# Altium PCB Monster_Tile.PcbDoc
Units mil, origin at the board's own origin, x right, y up, seen from the top; angles counter-clockwise.
Board outline 1250 x 1250 mil, 2 copper layers (Top Layer, Bottom Layer); 7 components, 5 nets, 24 pads, 0 vias.
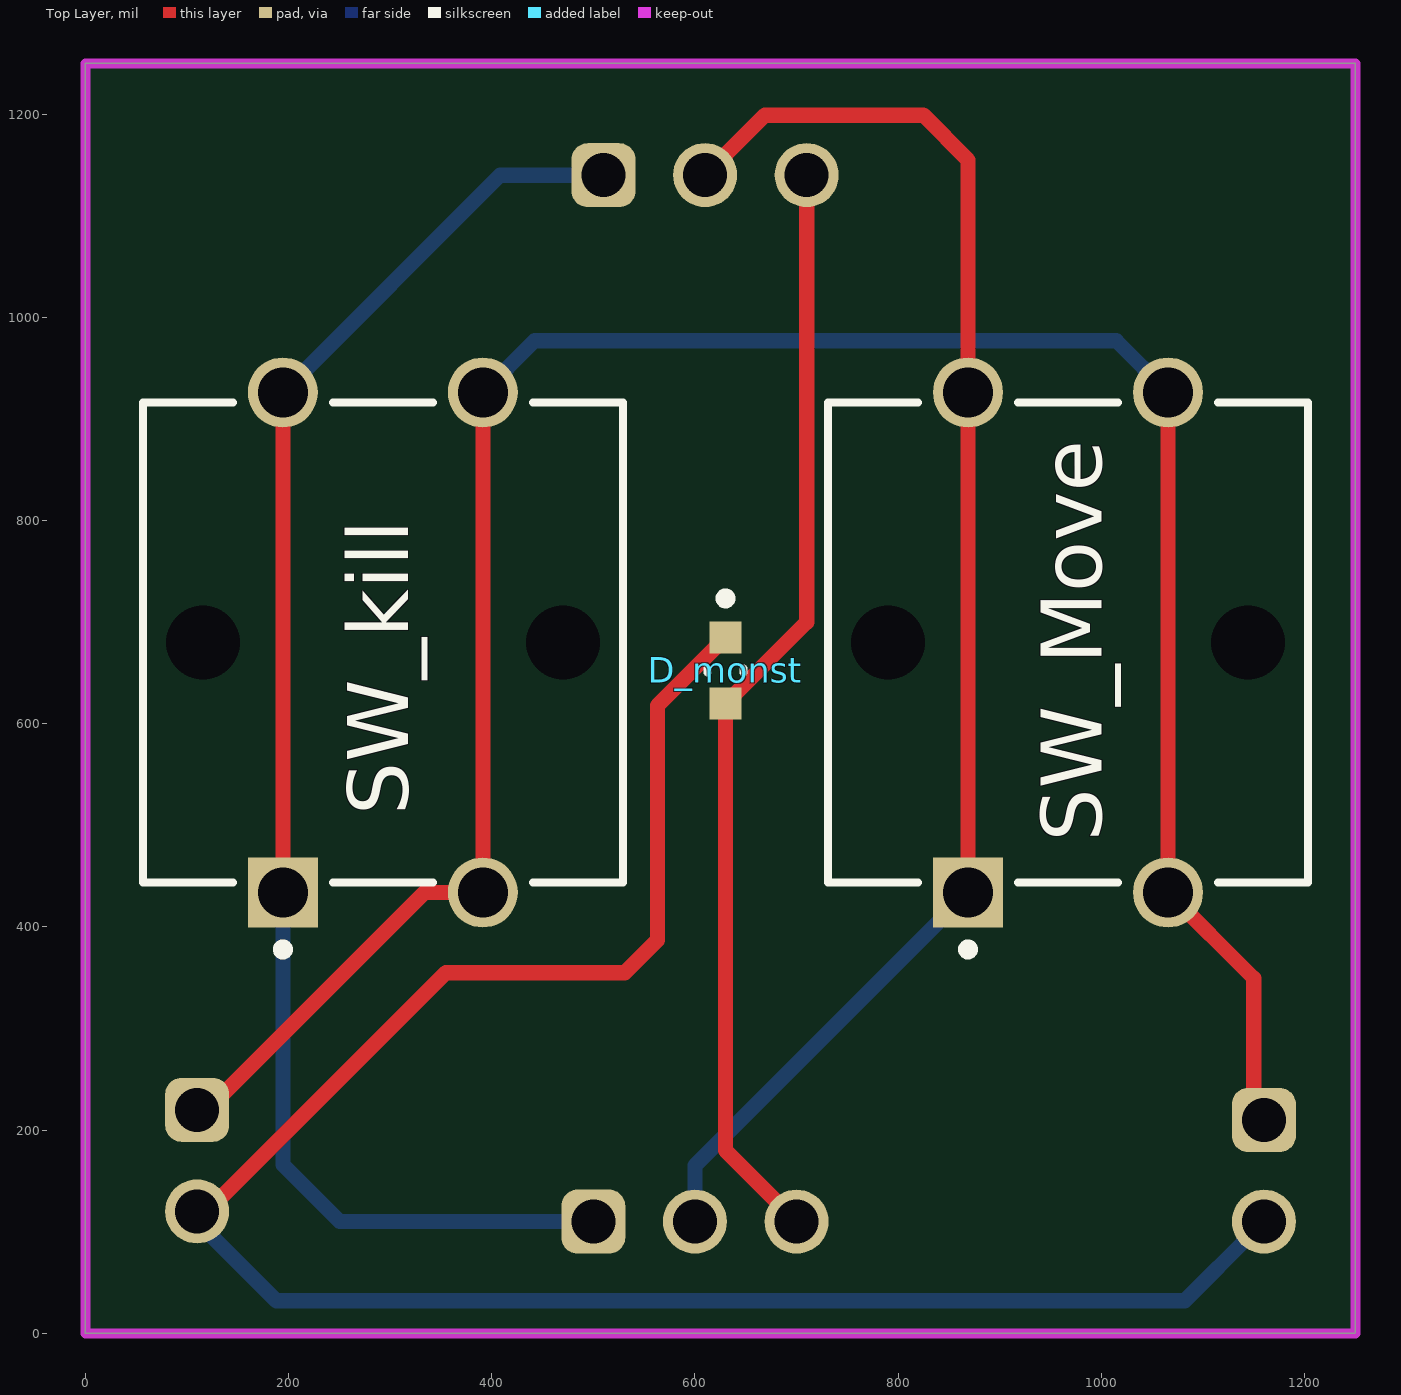
[diagram p0: Top Layer view]
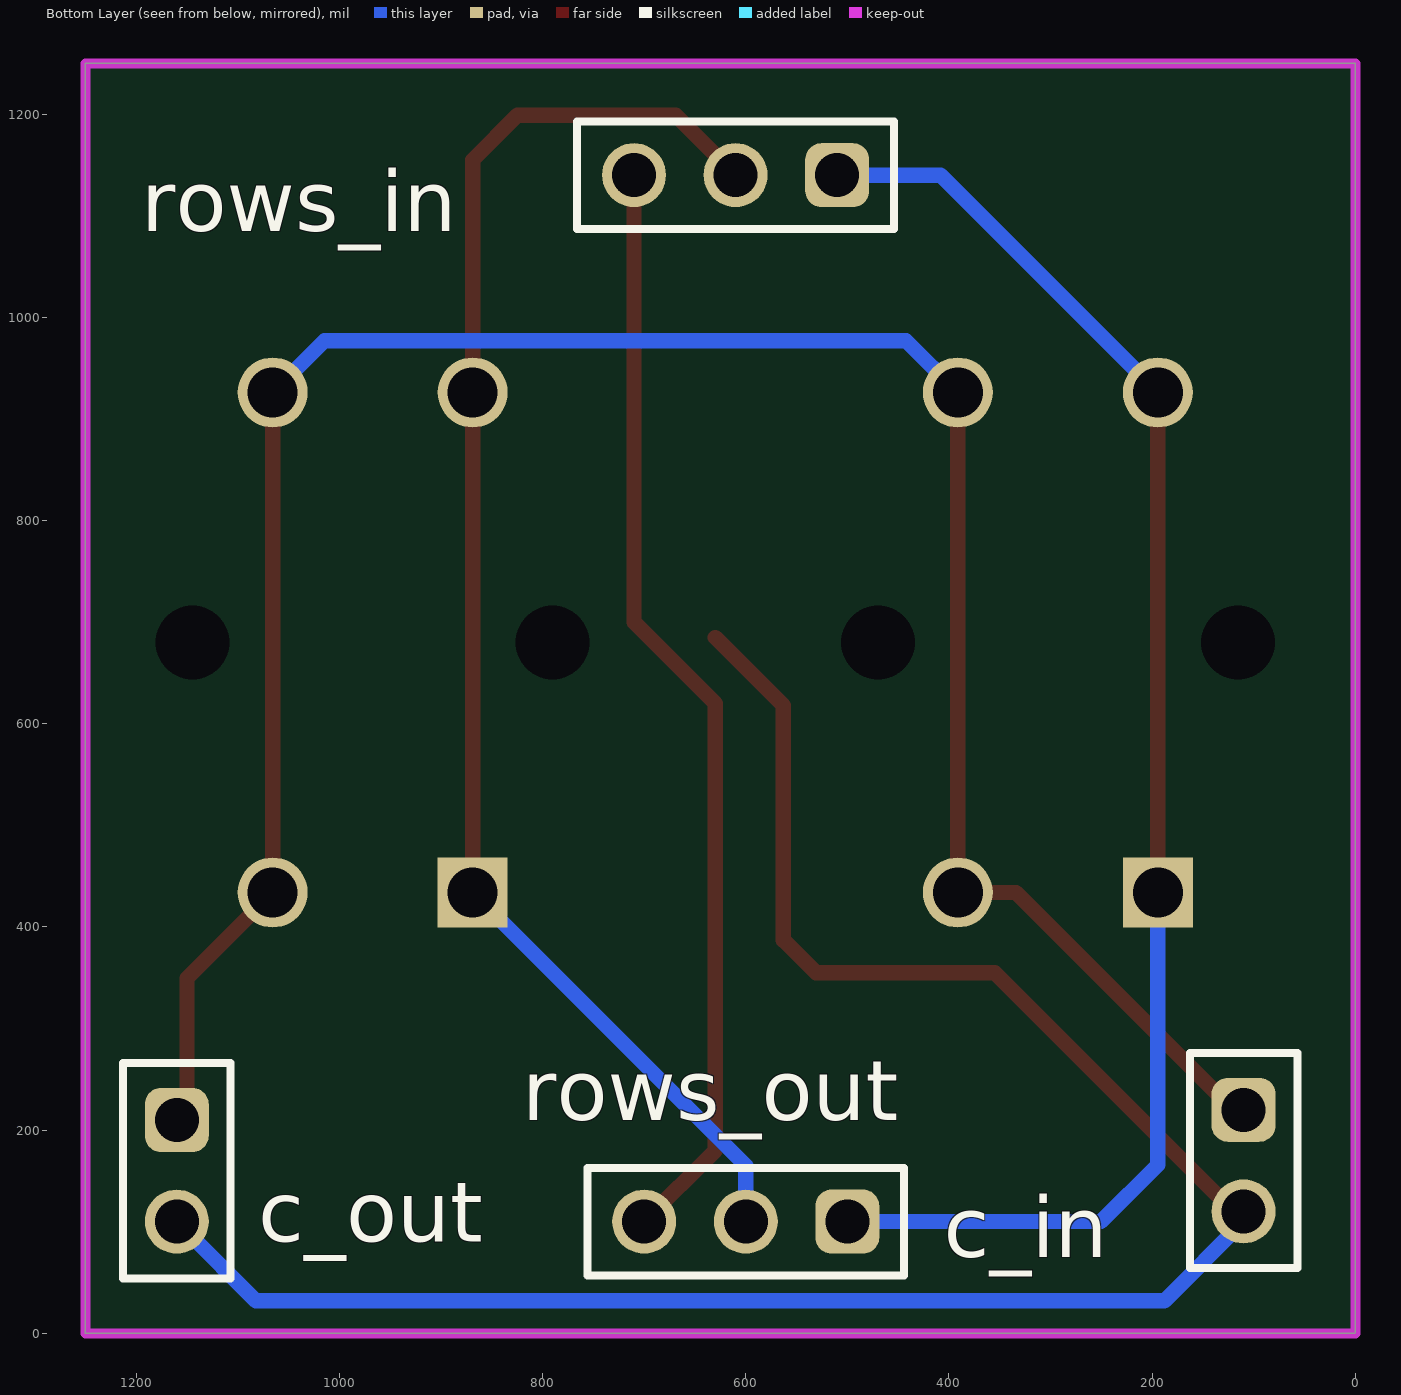
[diagram p1: Bottom Layer view, seen from below]
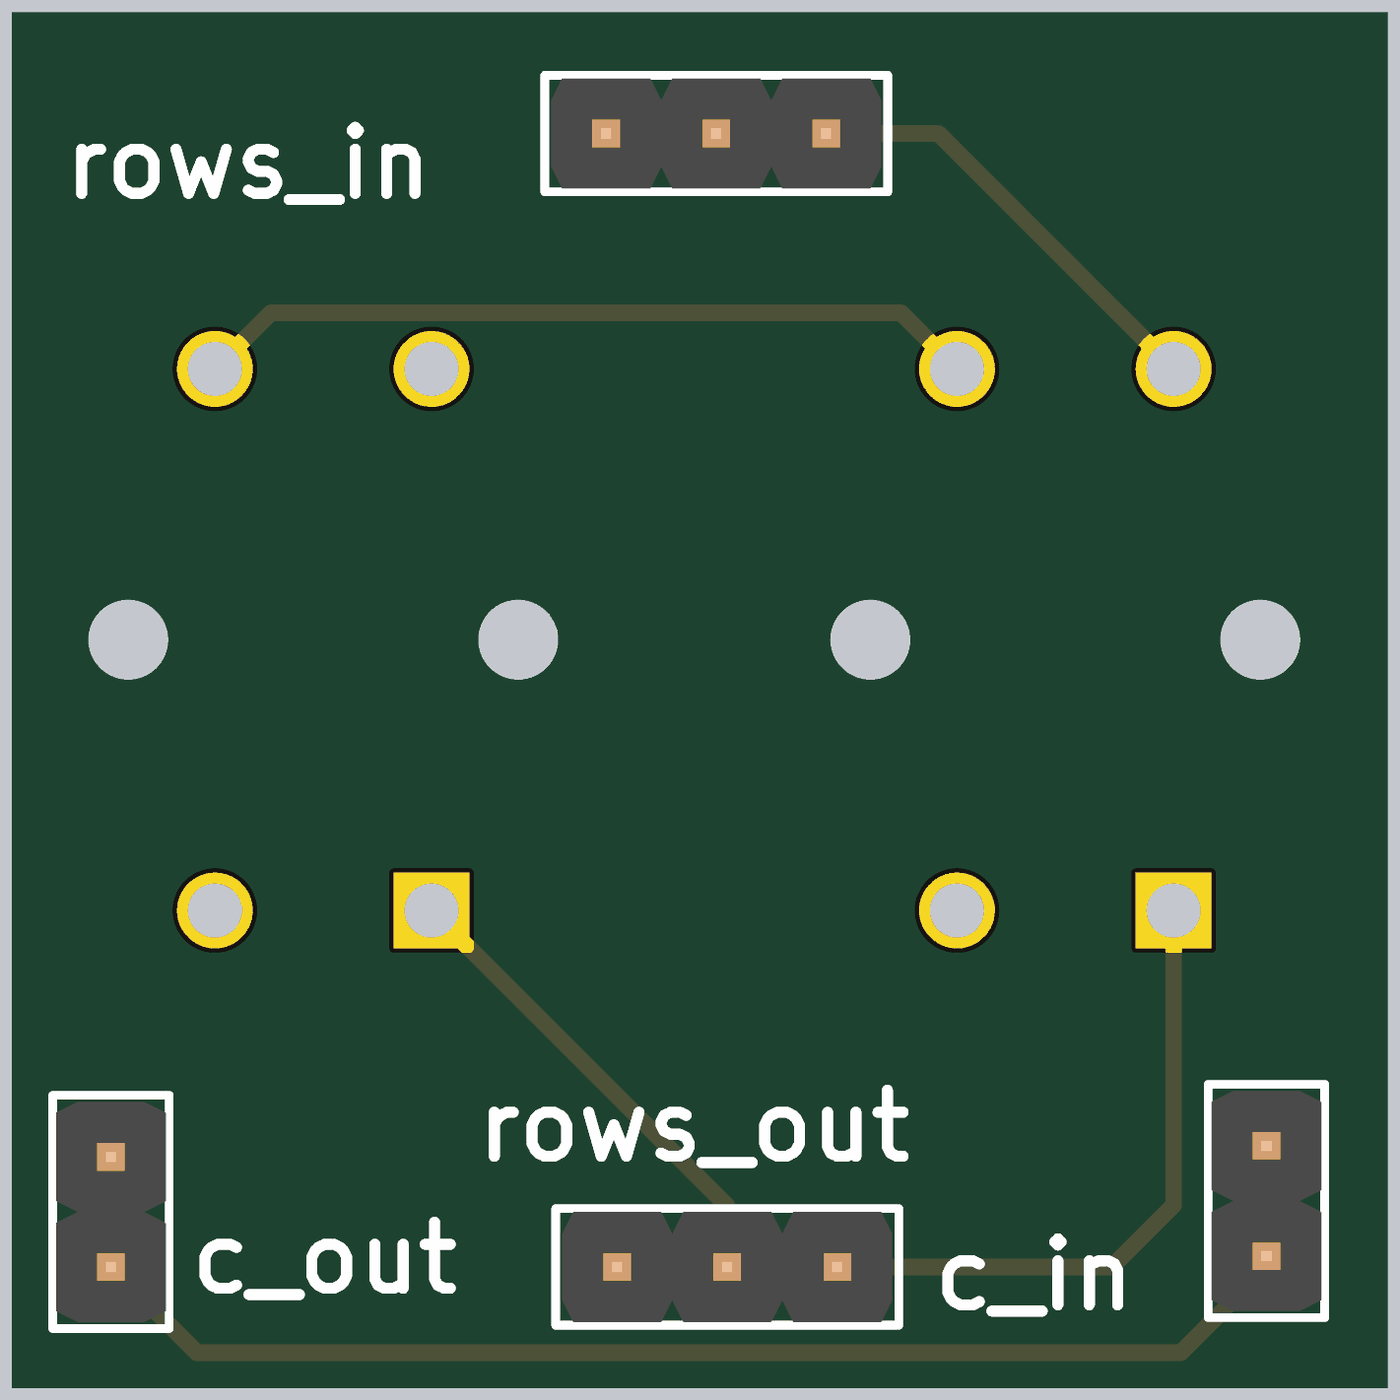
[diagram p2: 3D render of the assembled board from below, using the file's embedded part models]

## Layer stack, top to bottom
Top Solder: solder mask 0.4, Solder Resist, Dk 3.5
Top Layer: signal copper 1.4
Dielectric 1: dielectric 12.6, FR-4, Dk 4.8
Bottom Layer: signal copper 1.4
Bottom Solder: solder mask 0.4, Solder Resist, Dk 3.5

## Board outline
0,0 1250,0 1250,1250 0,1250

## Design rules (kind name [scope] priority, off if disabled: settings)
BoardOutlineClearance [All] p1: gap=7.87 ignorepadtopadclearanceinfootprint=FALSE except(15.75: Arc-SplitBarrior Arc-SplitContinuation Track-SplitBarrior Track-SplitContinuation SMDPad-SplitBarrior SMDPad-SplitContinuation THPad-SplitBarrior THPad-SplitContinuation Via-SplitBarrior Via-SplitContinuation Fill-SplitBarrior Fill-SplitContinuation Poly-SplitBarrior Poly-SplitContinuation Region-SplitBarrior Region-SplitContinuation Text-SplitBarrior Text-SplitContinuation)
Clearance "Clearance Bottom Layer" [OnLayer('Bottom Layer')] p1: gap=8 ignorepadtopadclearanceinfootprint=TRUE except(10: Arc-Text Track-Text SMDPad-Text THPad-Text Via-Text Fill-Text Poly-Text Region-Text Text-Text)
Clearance "Clearance Top Layer" [OnLayer('Top Layer')] p2: gap=8 ignorepadtopadclearanceinfootprint=TRUE except(10: Arc-Text Track-Text SMDPad-Text THPad-Text Via-Text Fill-Text Poly-Text Region-Text Text-Text)
Clearance [All] p3: gap=7.87 ignorepadtopadclearanceinfootprint=FALSE except(3.5: Arc-Arc Arc-Track Arc-SMDPad Track-Track Track-SMDPad SMDPad-SMDPad; 5: Arc-Via Track-Via SMDPad-Via THPad-Via Via-Via; 10: Arc-Text Track-Text SMDPad-Text THPad-Text Via-Text Fill-Text Poly-Text Region-Text Text-Text)
HoleSize [All] p1: absolutevalues=TRUE maxlimit=248.03 minlimit=7.87 maxpercent=80.000 minpercent=20.000
MinimumAnnularRing [All] p1: minimumring=3
MinimumSolderMaskSliver [All] p1: minsoldermaskwidth=3.94
PolygonConnect PolygonConnect_1 [All] p1: thpad.connectstyle=Relief thpad.reliefconductorwidth=20 thpad.reliefentries=4 thpad.polygonreliefangle="90 Angle" thpad.airgapwidth=10 smdpad.connectstyle=Relief smdpad.reliefconductorwidth=20 smdpad.reliefentries=4 smdpad.polygonreliefangle="90 Angle" smdpad.airgapwidth=10 via.connectstyle=Direct via.reliefconductorwidth=20 via.reliefentries=4 via.polygonreliefangle="90 Angle" via.airgapwidth=10
RoutingCorners [All] p1: cornerstyle=Round minsetback=100 maxsetback=100
RoutingVias [All] p1: holewidth=19.68 width=39.37 viastyle="Through Hole" minholewidth=7.87 minwidth=17.72 maxholewidth=39.37 maxwidth=78.74
SilkToSilkClearance [All] p1: silktosilkclearance=3.94
SilkToSolderMaskClearance [IsPad] p1: minsilkscreentomaskgap=3.94 clearancetoexposedcopper=TRUE
SolderMaskExpansion [All] p1: expansion=4 istentingtop=FALSE
Width [All] p1: maxlimit=100 minlimit=3.5 preferedwidth=15
25 further rules are at their usual default settings.

## Components (designator, comment, footprint, x,y, rotation, side; value= is the part's Value field where it differs from the comment)
c_in "61300211121" 61300211121 110,170 r270 bottom (schematic designator columns_in)
c_out "61300211121" 61300211121 1160,160 r270 bottom (schematic designator columns_out)
D_monst "APT1608QBC/D" FP-APT1608QBC-D-MFG 630,652.48 r270 top
rows_in "61300311121" 61300311121 610,1140 r0 bottom
rows_out "61300311121" 61300311121 600,110 r0 bottom
SW_kill "B3F-4055" OMRON-B3F-4055_V 292.83,680 r90 top
SW_Move "B3F-4055" OMRON-B3F-4055_V 967.17,680 r90 top (schematic designator SW_move)

## Footprints (in the part's own frame and the unit in brackets; to place one, negate y for a bottom-side part, rotate by r counter-clockwise, add the part's x,y. Pads: shape width x height; smd on the part's side, far side on the other; paste and mask are expansions set on the pad)
61300211121 [mm] "Pin Header, pitch 2.54 mm, THT, Vertical, single row, 2p"
  rrect50% 1.6x1.6 hole 1.1: 1(-1.27,0)
  round 1.6 hole 1.1: 2(1.27,0)
  silkscreen extent -2.69,-1.35 2.69,1.35, body extent -2.54,-1.27 2.54,1.27, height 8.57
61300311121 [mm] "Pin Header, pitch 2.54 mm, THT, Vertical, single row, 3p"
  rrect50% 1.6x1.6 hole 1.1: 1(-2.54,0)
  round 1.6 hole 1.1: 2(0,0) 3(2.54,0)
  silkscreen extent -3.96,-1.34 3.96,1.34, body extent -3.81,-1.27 3.81,1.27, height 8.57
FP-APT1608QBC-D-MFG [mm]
  rect 0.8x0.8 smd paste+0 mask+0: 1(-0.825,0) 2(0.825,0)
  silkscreen extent -1.92,-0.45 0.05,0.45, body extent -1.33,-0.55 1.33,0.55, height 0.25
OMRON-B3F-4055_V [mm] "THD, 4-Leads, Body 12x12mm"
  rect 1.75x1.75 hole 1.25: 1(-6.25,2.5)
  round 1.75 hole 1.25: 2(6.25,2.5) 3(-6.25,-2.5) 4(6.25,-2.5)
  round 1.55 hole 1.85 unplated: MH1(0,4.5) MH2(0,-4.5)
  silkscreen extent -7.8,-6 6,6, body extent -6,-6 6,6, height 7.5

## Part data
c_in c_out: library part CMP-1712-00002-5, Color=Black, Contact Resistance=20mΩ, Current Rating=3A, Max Operating Temperature=125°C, Min Operating Temperature=-40°C, Operating Supply Voltage=250V, Connector Type="Male Pin", Contact Gender=Male, Contact Material=Copper, Contact Mating Length=5.9944mm, Contact Plating=Gold, Gender=Male, Height=8.94mm, Housing Material=PBT, Lead Free="Lead Free", Lead Pitch=2.54mm, Mount="Through Hole", NexarPartId=20081794, Number of Contacts=2, Number of Pins=2, Number of Positions=2, Number of Rows=1, Orientation=Vertical, Packaging=Bulk, Pitch=2.54mm, REACH SVHC="No SVHC", RoHS=Compliant, Termination="Through Hole", Voltage Rating=250V
D_monst: library part CMP-2000-05788-2, "LED BLUE CLEAR CHIP SMD", Case Code (Imperial)=0603, Case Code (Metric)=1608, Color=Blue, Forward Current=20mA, Forward Voltage=3.3V, Lens Color=Colorless, Max Operating Temperature=85°C, Min Operating Temperature=-40°C, Package Quantity=2000, Case/Package=0603, Dominant Wavelength=465nm, Height=0.75mm, Illumination Color=Blue, Lead Free="Lead Free", Length=1.6mm, Lens Style=Flat, Lens Transparency=Clear, Luminous Intensity=100mcd, Mount="Surface Mount", Number of LEDs=1, Number of Pins=2, Packaging="Tape and Reel", Test Current=20mA, Viewing Angle=120°, Width=0.8mm
rows_in rows_out: library part CMP-1502-01062-2, Color=Black, Contact Resistance=20mΩ, Current Rating=3A, Max Operating Temperature=105°C, Min Operating Temperature=-40°C, Operating Supply Voltage=250V, Connector Type="Male Pin", Contact Material=Copper, Contact Mating Length=5.9944mm, Contact Plating=Gold, Gender=Male, Height=8.94mm, Lead Free="Lead Free", Lead Pitch=2.54mm, Mount="Through Hole", NexarPartId=32855521, Number of Contacts=3, Number of Pins=3, Number of Positions=3, Number of Rows=1, Orientation=Vertical, Packaging=Bulk, Pitch=2.54mm, REACH SVHC=Unknown, RoHS=Compliant, Termination=Solder, Voltage Rating=250V
SW_kill SW_Move: library part CMP-2000-05902-1, "Tactile Switch, 1 to 50 mA, 100 mOhm Max, 5 to 24 VDC, -25 to 70 degC, 4-Pin THD, RoHS, Bulk", Actuator Color=Orange, Contact Rating @ Voltage=0.05@24VDCA, Dielectric Strength=500VAC, Manufacturer=OmronElectronics, Maximum AC Voltage Rating=N/A, Maximum Contact Resistance=100mOhm, Maximum DC Voltage Rating=24V, Minimum Insulation Resistance=100MOhm, Operating Force=2.55N, Operating Temperature=-25to70C, Package Description="4-Pin Through Hole Device, Body 12 x 12 mm", Actuator Length=3mm, Actuator Style=ProjectedPlunger, Base Material=N/A, Body Orientation=Straight, Contact Material=N/A, Contact Plating=Gold, Datasheet URL=https://datasheet.ciiva.com/20148/78-0136-20148640.pdf, Datasheet Version=06/2009, Dimension=12x12x7.3mm, Electrical Life=1000000Cycles, Family=B3F, Ground Terminal=No, Housing Material=N/A, Illumination Type=N/R, Manufacturer URL=http://www.omron.com/, Mechanical Life=N/A, Mounting=ThroughHole,PCPins, Mounting Technology=ThroughHole, Package Reference=B3F-4055, Packaging=Bag, Part No=B3F-4055, Pole Throw Configuration=SPST, Product Weight=0.85g, RoHS=Yes, Seal Description=N/A, Seal Location=N/A, Switch Configuration=N.O., Type=Miniature

## Nets (pads, with @x,y where several pads share a name; then routed paths per layer and width w, separated by ;. In a path a pad name is that pad's centre, name@x,y a point inside that pad or via, vN(x,y) a via of type N, cw(c..) or ccw(c..) an arc to the next point about the centre after c; other vN are vias at no path point)
"key column": c_in.1 c_out.1 SW_kill.3 SW_kill.4 SW_Move.3 SW_Move.4 | length 2343.7
  Top Layer w15: c_in.1@110,210 333.94,433.94 SW_kill.3 SW_kill.4 ; SW_Move.4 SW_Move.3 1150,349.53 c_out.1@1150,200
  Bottom Layer w15: SW_kill.4 442.2,977 1014.65,977 SW_Move.4
"kill row": rows_in.1 rows_out.1 SW_kill.1 SW_kill.2 | length 1493.1
  Top Layer w15: SW_kill.1 SW_kill.2
  Bottom Layer w15: SW_kill.1 194.41,166 250.41,110 rows_out.1 ; SW_kill.2 408.35,1140 rows_in.1
LED_column: c_in.2 c_out.2 D_monst.1 | length 1993.9
  Top Layer w15: c_in.2@110,110 355,355 531,355 563,387 563,617.96 D_monst.1
  Bottom Layer w15: c_in.2@110,110 188,32 1082,32 c_out.2@1150,100
LED_row: D_monst.2 rows_in.3 rows_out.3 | length 1092.1
  Top Layer w15: rows_out.3 630,180 D_monst.2 710,700 rows_in.3
"move row": rows_in.2 rows_out.2 SW_Move.1 SW_Move.2 | length 1457.7
  Top Layer w15: rows_in.2 669,1199 824.74,1199 868.74,1155 SW_Move.2 SW_Move.1
  Bottom Layer w15: rows_out.2 600,165.2 SW_Move.1
pads on no net: SW_kill.MH1 SW_kill.MH2 SW_Move.MH1 SW_Move.MH2

## Keep-outs
Keep-Out Layer:
  the board outline again, w10